# Altium PCB U_I_Meter_WIFI.PcbDoc
Units mm, origin at the board's own origin, x right, y up, seen from the top; angles counter-clockwise.
Board outline 66.83 x 47.73 mm, 2 copper layers (Top Layer, Bottom Layer), stack 1.071 mm thick; 21 components, 10 nets, 106 pads, 8 vias.
Unrouted connection lines stored in the file: 1.
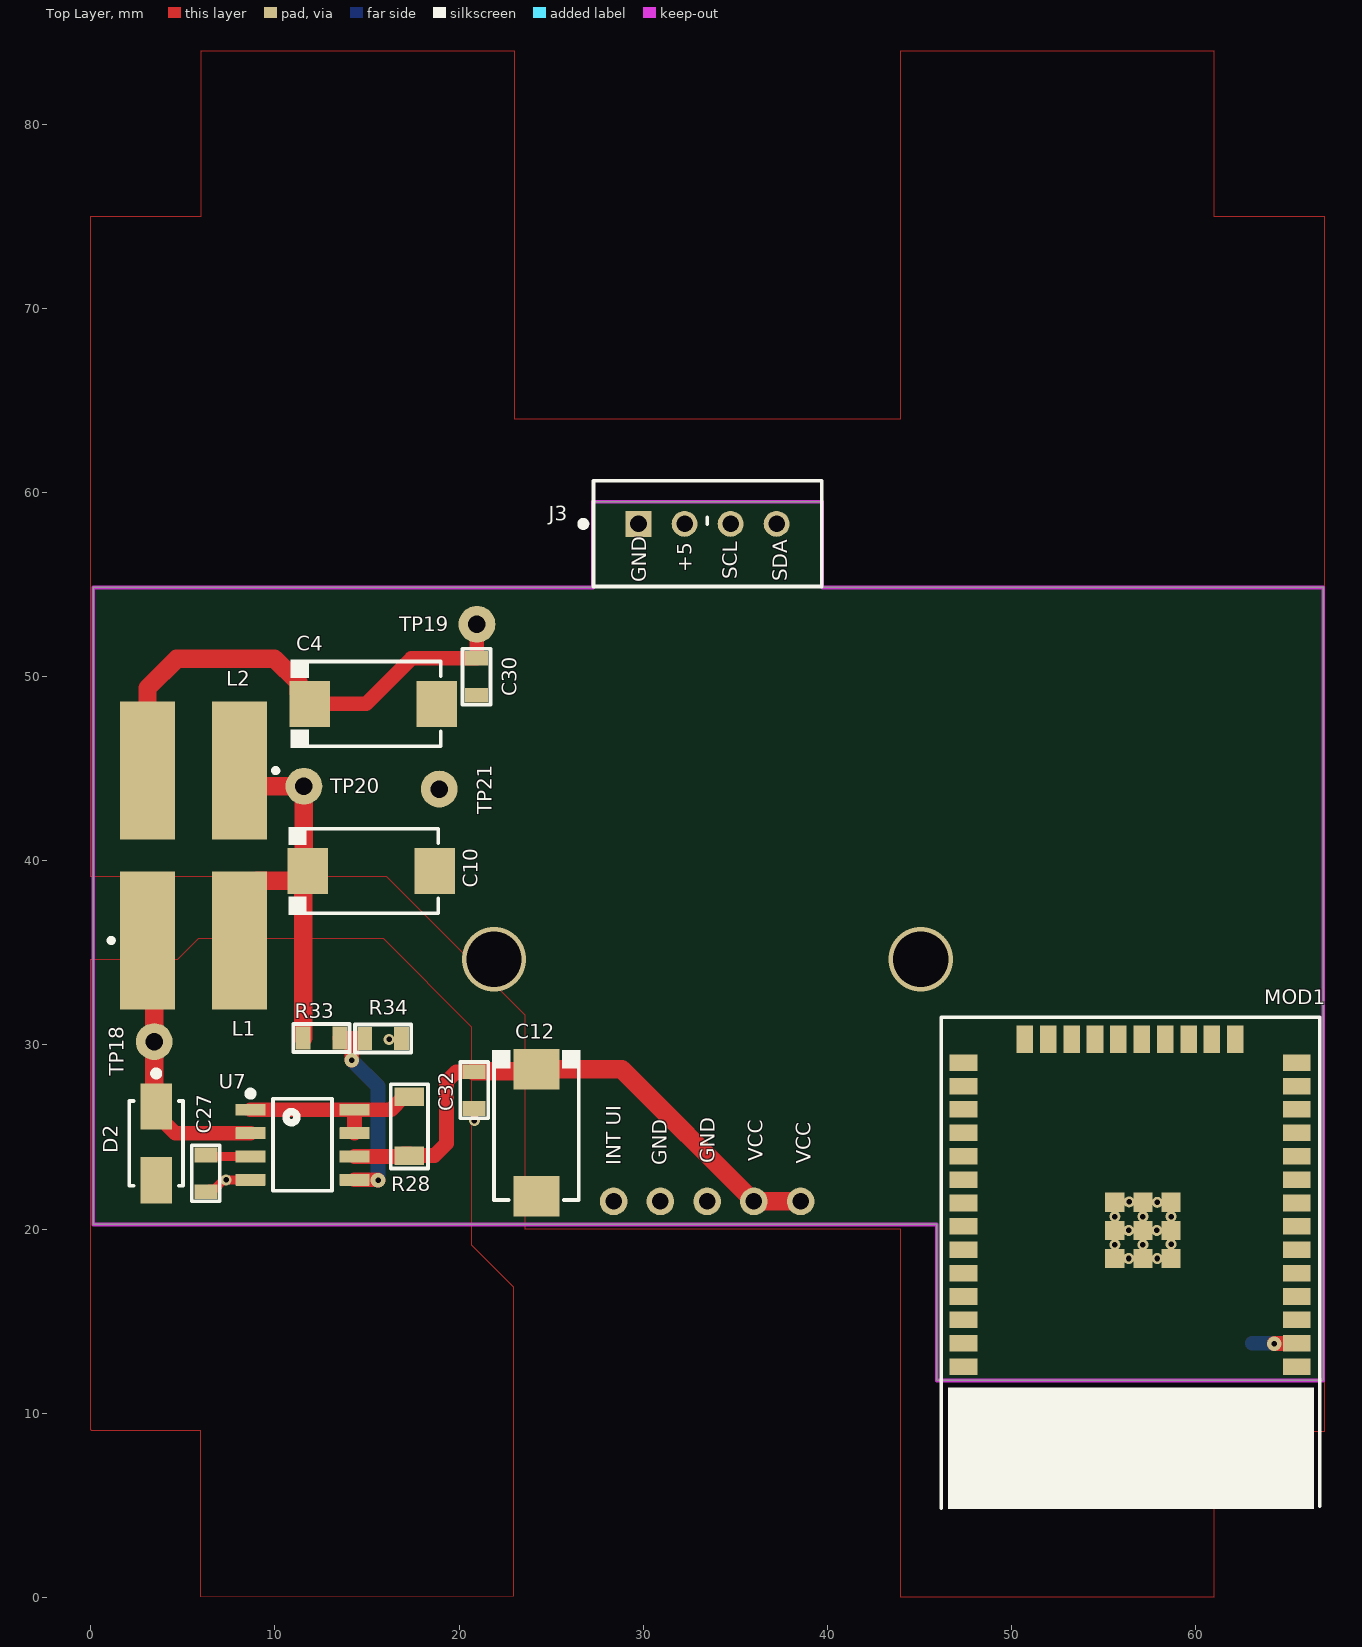
[diagram p0: Top Layer view]
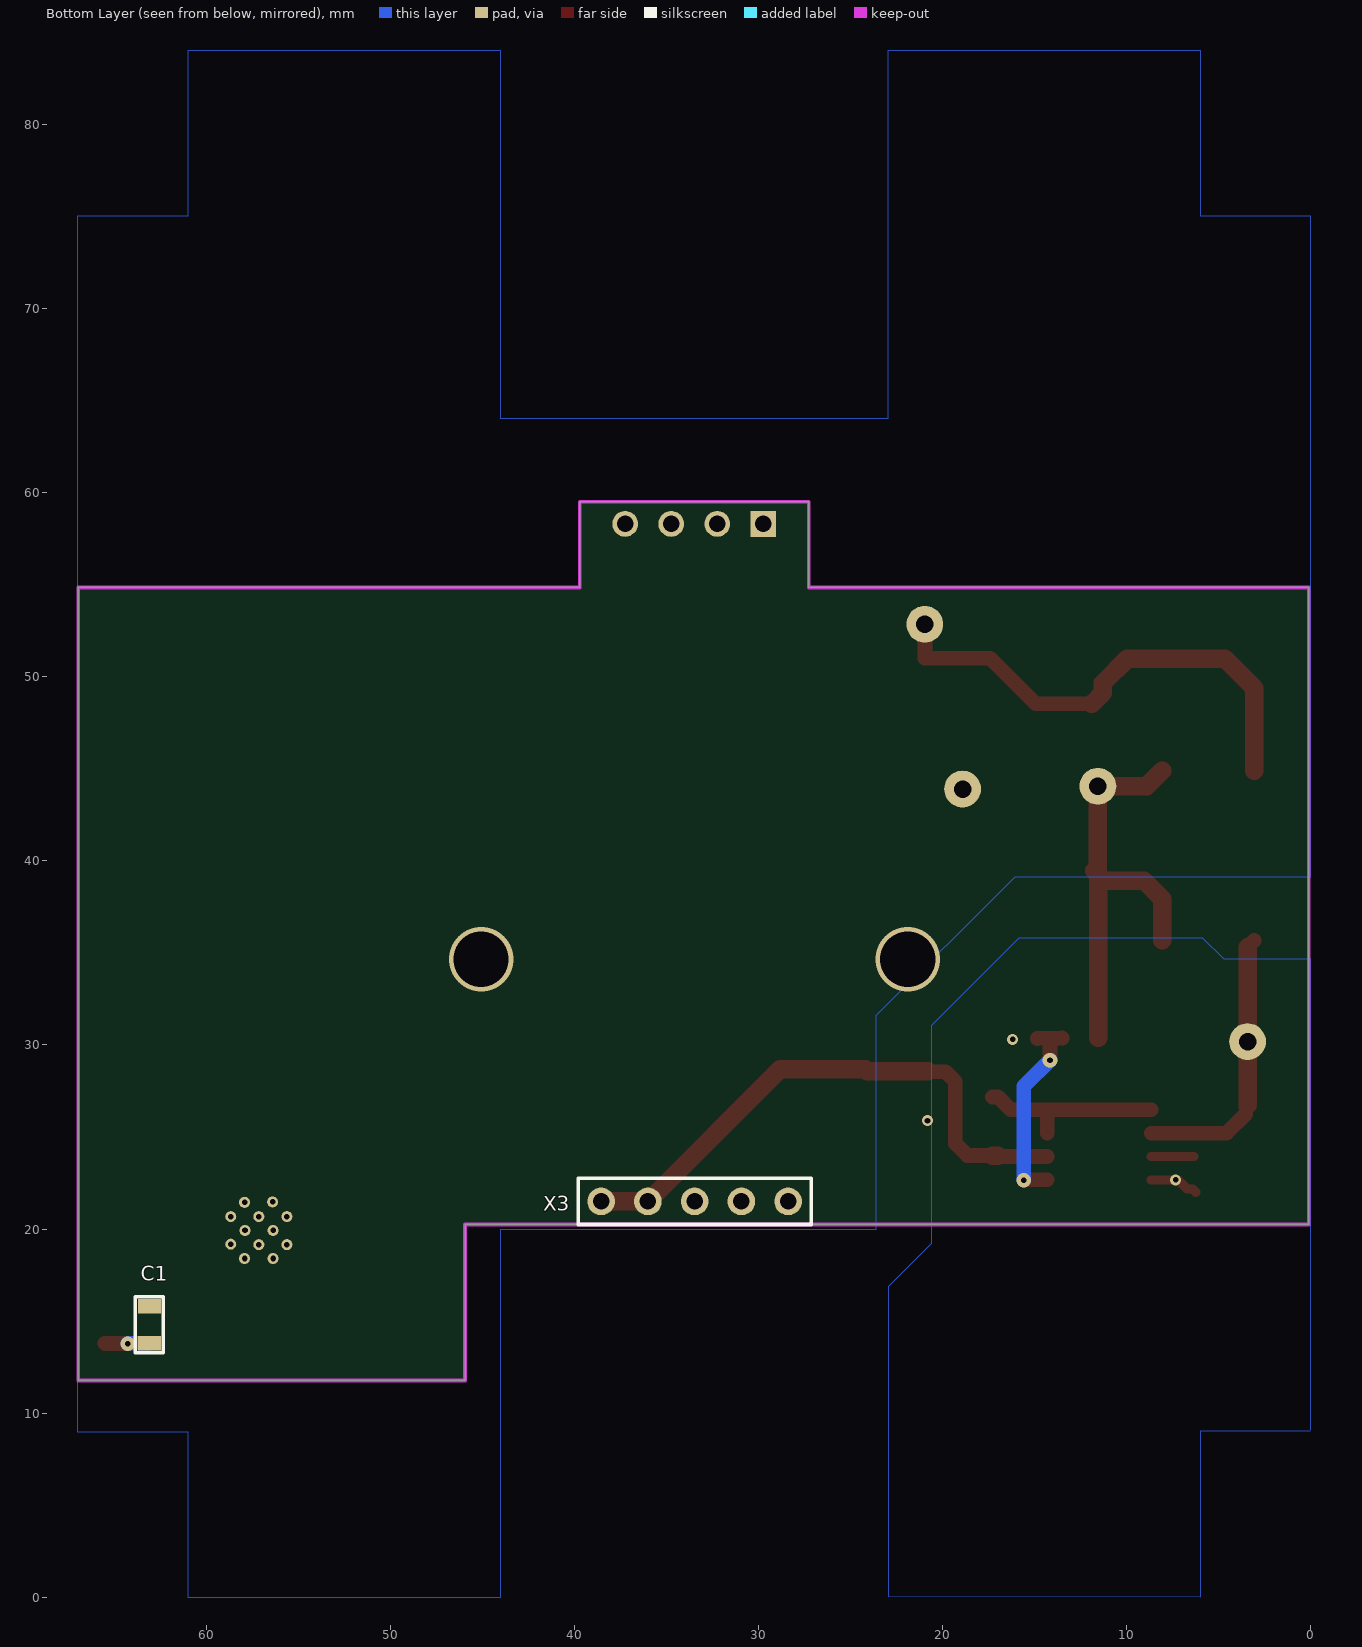
[diagram p1: Bottom Layer view, seen from below]
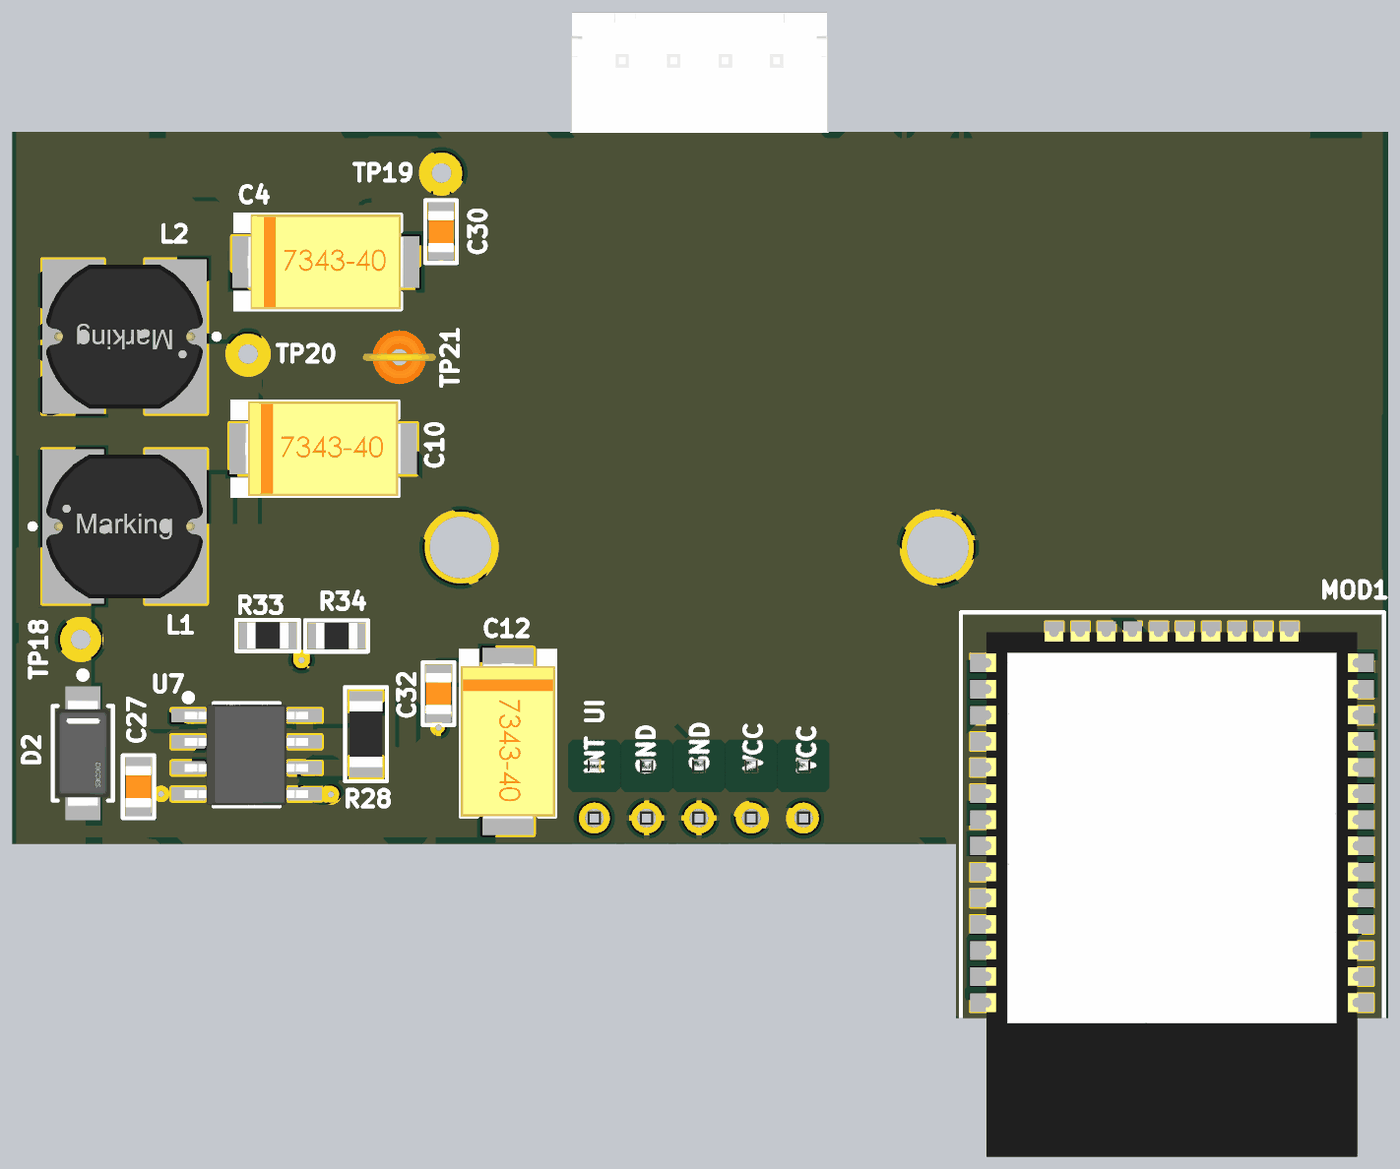
[diagram p2: 3D render of the assembled board from above, using the file's embedded part models]

## Layer stack, top to bottom
Top Solder: solder mask 0.0102, Solder Resist, Dk 3.5
Top Layer: signal copper 0.0356
Dielectric 1: dielectric 1, FR-4, Dk 4.8
Bottom Layer: signal copper 0.0356
Bottom Solder: solder mask 0.0102, Solder Resist, Dk 3.5

## Board outline
0.125,20.25 0.125,54.85 27.275,54.85 27.275,59.5 39.725,59.5 39.725,54.85 66.95,54.85 66.95,11.775 45.95,11.775 45.95,20.25

## Design rules (kind name [scope] priority, off if disabled: settings)
Clearance [All] p1: gap=0.2 ignorepadtopadclearanceinfootprint=FALSE except(0.254: THPad-THPad THPad-Via THPad-Fill THPad-Poly THPad-Region THPad-Text THPad-Hole Via-Via Via-Fill Via-Poly Via-Region Via-Text Via-Hole Fill-Fill Fill-Poly Fill-Region Fill-Text Fill-Hole Poly-Poly Poly-Region Poly-Text Poly-Hole Region-Region Region-Text Region-Hole Text-Text Text-Hole)
ComponentClearance [All] p1: gap=-1 collisioncheckmode=3 verticalgap=0 showdistances=FALSE
Height [All] p1: minheight=-1 maxheight=100 prefheight=12.7
PolygonConnect [All] p1: connectstyle=Relief reliefconductorwidth=0.254 reliefentries=4 polygonreliefangle="90 Angle" airgapwidth=0.254
RoutingVias [All] p1: holewidth=0.711 width=1.27 viastyle="Through Hole" minholewidth=0.711 minwidth=1.27 maxholewidth=0.711 maxwidth=1.27
SolderMaskExpansion [All] p1: expansion=0.102 istentingtop=FALSE
Width [All] p1: maxlimit=10 minlimit=0.254 preferedwidth=0.254 minimp=50.000000 maximp=50.000000 favimp=50.000000
28 further rules are at their usual default settings.

## Components (designator, comment, footprint, x,y, rotation, side; value= is the part's Value field where it differs from the comment)
C1 "0.1uF" CAP-0805 63.1,14.8 r270 bottom
C4 "100uF_16V" CAP-TAN-D 15.35,48.525 r0 top
C10 "100uF_16V" CAP-TAN-D 15.225,39.45 r0 top
C12 "100uF_16V" CAP-TAN-D 24.2,25.225 r270 top
C27 "470pF" CAP-0805 6.25,23.025 r270 top
C30 "0.1uF" CAP-0805 20.95,50 r90 top
C32 "0.47uF" CAP-0805 20.825,27.55 r270 top
D2 "US1G" US1G_SMA 3.55,24.65 r270 top
J3 "B4B-XH-A(LF)(SN)" B4B-XH-A 33.5,57.775 r180 top
L1 "47µH, 1.17A" WE-PD2_7850 5.575,35.675 r0 top
L2 "47µH, 1.17A" WE-PD2_7850 5.575,44.9 r180 top
MOD1 "MOD-ESP32-WROOM-32E" MOD-ESP32-WROOM-32E 56.45,21.415 r180 top locked
R28 "0.33" RES-1206 17.3,25.575 r90 top
R33 "3.8K" RES-0805 12.525,30.375 r0 top
R34 "1.2K" RES-0805 15.875,30.35 r180 top
TP18 "Test_Point_PCB" Test_Point 3.444,30.181 r90 top
TP19 "Test_Point_PCB" Test_Point 20.975,52.85 r90 top
TP20 "Test_Point_PCB" Test_Point 11.575,44.05 r270 top
TP21 "Test_Point_PCB" Pin_Test_Point(Orange) 18.925,43.9 r90 top
U7 "MC34063" SOIC-8_M 11.5,24.575 r0 top
X3 "CONN-5-PIN" CONN-PLS-5-2.54_2 28.395,21.5 r0 bottom locked

## Footprints (in the part's own frame and the unit in brackets; to place one, negate y for a bottom-side part, rotate by r counter-clockwise, add the part's x,y. Pads: shape width x height; smd on the part's side, far side on the other; paste and mask are expansions set on the pad)
B4B-XH-A [mm]
  rect 1.4x1.4 hole 0.9 paste-2539.97 mask+0: 1(3.75,-0.525)
  round 1.4 hole 0.9 paste-2539.97 mask+0: 2(1.25,-0.525) 3(-1.25,-0.525) 4(-3.75,-0.525)
  silkscreen extent -6.2,-2.88 6.87,2.88, body extent -6.3,-2.98 6.3,2.98, height 0.25
CAP-0805 [mm]
  rect 0.8x1.25 smd mask+0.015: 1(-1,0) 2(1,0)
  silkscreen extent -1.52,-0.76 1.52,0.76, body extent -1,-0.62 1,0.63, height 0.8
CAP-TAN-D [mm]
  rect 2.2x2.5 smd: 1(-3.45,0) 2(3.45,0)
  silkscreen extent -4.5,-2.4 3.65,2.4, body extent -3.8,-2.3 3.8,2.3, height 4
CONN-PLS-5-2.54_2 [mm]
  round 1.5 hole 0.9: 1(0,0) 2(2.54,0) 3(5.08,0) 4(7.62,0) 5(10.16,0)
  silkscreen extent -1.25,-1.25 11.41,1.25, body extent -1.27,-3.81 11.43,1.27, height 19.54
MOD-ESP32-WROOM-32E [mm]
  rect 1.5x0.9 smd paste+0 mask+0.05: 1(-9.05,8.89) 2(-9.05,7.62) 3(-9.05,6.35) 4(-9.05,5.08) 5(-9.05,3.81) 6(-9.05,2.54) 7(-9.05,1.27) 8(-9.05,0) 9(-9.05,-1.27) 10(-9.05,-2.54) 11(-9.05,-3.81) 12(-9.05,-5.08) 13(-9.05,-6.35) 14(-9.05,-7.62) 25(9.05,-7.62) 26(9.05,-6.35) 27(9.05,-5.08) 28(9.05,-3.81) 29(9.05,-2.54) 30(9.05,-1.27) 31(9.05,0) 32(9.05,1.27) 33(9.05,2.54) 34(9.05,3.81) 35(9.05,5.08) 36(9.05,6.35) 37(9.05,7.62) 38(9.05,8.89)
  rect 0.9x1.5 smd paste+0 mask+0.05: 15(-5.715,-8.89) 16(-4.445,-8.89) 17(-3.175,-8.89) 18(-1.905,-8.89) 19(-0.635,-8.89) 20(0.635,-8.89) 21(1.905,-8.89) 22(3.175,-8.89) 23(4.445,-8.89) 24(5.715,-8.89)
  rect 1.05x1.05 smd paste+0 mask+0.05: 39(-2.225,1.49) 39(-2.225,3.015) 39(-2.225,-0.035) 39(-0.7,3.015) 39(-0.7,1.49) 39(-0.7,-0.035) 39(0.825,3.015) 39(0.825,1.49) 39(0.825,-0.035)
  round 0.6 hole 0.3: 39(-2.225,2.24) 39(-2.225,0.74) 39(-1.475,3.015) 39(-1.475,-0.035) 39(-1.45,1.49) 39(-0.7,2.265) 39(-0.7,0.74) 39(0.05,-0.06) 39(0.075,3.015) 39(0.075,1.49) 39(0.825,2.265) 39(0.825,0.74)
  silkscreen extent -10.3,-10.08 10.25,16.62, body extent -9.04,-9.16 9.04,16.38, height 3
Pin_Test_Point(Orange) [mm]
  round 2 hole 0.95: 1(0,0)
  body extent -1.3,-1.78 1.3,1.78, height 6.93
RES-0805 [mm]
  rect 0.8x1.25 smd mask+0.015: 1(-1,0) 2(1,0)
  silkscreen extent -1.52,-0.76 1.52,0.76, body extent -1,-0.62 1,0.63, height 0.6
RES-1206 [mm]
  rect 1x1.6 smd: 1(-1.6,0) 2(1.6,0)
  silkscreen extent -2.29,-1.02 2.29,1.02, body extent -1.6,-0.8 1.6,0.8, height 0.6
SOIC-8_M [mm]
  rrect15% 1.65x0.65 smd: 1(-2.825,1.905) 2(-2.825,0.635) 3(-2.825,-0.635) 4(-2.825,-1.905) 5(2.825,-1.905) 6(2.825,-0.635) 7(2.825,0.635) 8(2.825,1.905)
  silkscreen extent -2.95,-2.5 1.6,2.9, body extent -3,-2.45 3,2.45, height 1.63
Test_Point [mm]
  round 2 hole 0.95: 1(0,0)
US1G_SMA [mm]
  rect 2.5x1.7 smd paste+0 mask+0: 1(-2,0) 2(2,0)
  silkscreen extent -3.92,-1.46 2.3,1.46, body extent -2.6,-1.3 2.6,1.3, height 2.4
WE-PD2_7850 [mm] "SMD Power Inductor, 2-Leads, body 7.8x7mm"
  rect 3x7.5 smd: 1(-2.5,0) 2(2.5,0)
  silkscreen extent -4.59,-0.12 -4.34,0.12, body extent -3.81,-3.5 3.81,3.5, height 4.95

## Part data
C1 C27 C30 C32: library part CAP-NON-POLAR
C4 C10 C12: library part CAP_POL_SMD
L1 L2: library part 744775147, "WE-PD2 SMT Power Inductor, size 7850, 47µH, 1.17A, 0.18Ω", Case/Size Code=7850, DC Resistance=0.134Ω, DC Resistance Max=0.18Ω, Inductance=47µH, Manufacturer="Wurth Elektronik", Operating Temperature Max=125°C, Operating Temperature Min=-40°C, Rated Current=1.17A, Saturation Current=1.24A, Self Resonant Frequency=12MHz, Category="Unshielded Power Inductors", ComponentLink1Description="Website Link", ComponentLink1URL=https://www.we-online.com/redexpert/article/744775147?ad, ComponentLink2Description="Datasheet Link", ComponentLink2URL=https://www.we-online.com/redexpert/spec/744775147?ad, Height=4.95mm, Length=7.8mm, Manufacturer Part Number=744775147, Match Code=WE-PD2, Mount="Surface Mount", Packaging="Tape and Reel", Width=7mm
R28 R34: library part RES-CONST
R33: library part RES-CONST, "10K"
TP18 TP19 TP20 TP21: library part TP_PCB?, "Test_Point"

## Via types
v1: diameter 0.6, hole 0.3, Top Layer to Bottom Layer, 3 vias
v2: diameter 0.8, hole 0.3, Top Layer to Bottom Layer, 3 vias
v3: diameter 3.5, hole 3, Top Layer to Bottom Layer, 2 vias

## Nets (pads, with @x,y where several pads share a name; then routed paths per layer and width w, separated by ;. In a path a pad name is that pad's centre, name@x,y a point inside that pad or via, vN(x,y) a via of type N, cw(c..) or ccw(c..) an arc to the next point about the centre after c; other vN are vias at no path point)
3V3: C1.2 C4.1 C30.2 L2.2 MOD1.2 TP19.1 | length 29.6
  Top Layer w0.8: C4.1 14.95,48.525 17.425,51 C30.2 20.962,51 20.962,52.837 TP19.1 ; v2(64.275,13.775) 64.285,13.785 65.49,13.785 MOD1.2
  Top Layer w1: L2.2 3.081,44.906 3.081,49.381 4.675,50.975 9.975,50.975 11.3,49.65 11.3,49.125 C4.1
  Bottom Layer w0.8: C1.2 64.25,13.8 v2(64.275,13.775)
EN: 
GND_III: C1.1 C4.2 C10.2 C12.2 C27.2 C30.1 C32.2 D2.2 J3.1 MOD1.1 MOD1.15 MOD1.38 MOD1.39 R34.1 TP21.1 U7.4 X3.2 X3.3 | length 2.7
  Top Layer w0.5: C27.2@6.261,22 6.436,22.175 6.725,22.175 7.22,22.67 U7.4
  other v1: 7.35,22.675 20.828,25.891 16.2,30.3
NetC10_1: C10.1 L1.2 L2.1 R33.1 TP20.1 | length 23.8
  Top Layer w1: L1.2 8.075,37.925 9.075,38.925 11.5,38.925 C10.1@11.55,38.975 ; L2.1 8.925,44.05 TP20.1 C10.1@11.575,39.45 ; R33.1@11.55,30.375 C10.1@11.55,38.975 ; C10.1 11.55,39.225 C10.1@11.55,38.975
NetC27_1: C27.1 U7.3 | length 2.3
  Top Layer w0.5: C27.1@6.372,23.94 U7.3
NetD2_1: D2.1 L1.1 TP18.1 U7.2 | length 14.8
  Top Layer w0.8: L1.1 L1.1@3.444,35.306 ; D2.1@3.444,26.756 D2.1 ; D2.1@3.55,26.25 4.59,25.21 U7.2
  Top Layer w1: D2.1@3.444,26.756 TP18.1 L1.1@3.444,35.306
NetR28_2: R28.2 U7.1 U7.7 U7.8 | length 10.2
  Top Layer w0.8: U7.1 U7.8 ; U7.7 U7.8 ; R28.2 17,27.175 16.305,26.48 U7.8
NetR33_2: R33.2 R34.2 U7.5 | length 10.9
  Top Layer w0.8: R33.2 13.525,30.362 14.175,30.362 14.875,30.362 R34.2 ; v2(14.175,29.175) 14.175,30.337 ; U7.5 15.58,22.67 v2(15.6,22.65)
  Bottom Layer w0.8: v2(14.175,29.175) 15.6,27.75 v2(15.6,22.65)
NetX3_1: X3.1
VCC: C12.1 C32.1 R28.1 U7.6 X3.4 X3.5 | length 31.1
  Top Layer w0.8: U7.6 R28.1@16.965,23.94 ; R28.1 17.324,23.999 18.674,23.999 19.325,24.65 19.325,28.025 19.85,28.55 C32.1
  Top Layer w1: R28.1@17,23.975 R28.1 ; C32.1@20.825,28.575 24.1,28.575 C12.1 28.84,28.675 X3.4 X3.5
pads on no net: J3.2 J3.3 J3.4 MOD1.3 MOD1.4 MOD1.5 MOD1.6 MOD1.7 MOD1.8 MOD1.9 MOD1.10 MOD1.11 MOD1.12 MOD1.13 MOD1.14 MOD1.16 MOD1.17 MOD1.18 MOD1.19 MOD1.20 MOD1.21 MOD1.22 MOD1.23 MOD1.24 MOD1.25 MOD1.26 MOD1.27 MOD1.28 MOD1.29 MOD1.30 MOD1.31 MOD1.32 MOD1.33 MOD1.34 MOD1.35 MOD1.36 MOD1.37
copper on no net:
  other v3: 21.9,34.65 45.075,34.65

## Polygon pours and split planes (outlines as drawn)
GND_III on Top Layer "NONET_L-01_P-001" (solid, shelved, pour order 4): 0.125,54.85 27.275,54.85 27.25,54.875 27.25,59.475 27.275,59.5 39.725,59.5 39.725,54.85 66.95,54.85 66.95,11.775 45.95,11.775 45.95,20.25 0.125,20.25
GND_III on Top Layer "NONET_L-01_P-001" (solid, shelved, pour order 3): 44,0 44,20 23.6,20 23.6,31.6 16.075,39.125 0,39.125 0,75 6,75 6,84 23,84 23,64 44,64 44,84 61,84 61,75 67,75 67,9 61,9 61,0
no net on Top Layer "NONET_L-01_P-001" (solid, shelved, pour order 1): 5.975,0.025 5.975,9.05 0.05,9.05 0,9.1 0,34.65 4.72,34.65 5.87,35.8 15.875,35.8 20.675,31 20.675,19.15 22.95,16.875 22.95,0.05
no net on Bottom Layer "NONET_L-01_P-001" (solid, shelved, pour order 5): 0.125,54.85 27.275,54.85 27.25,54.875 27.25,59.475 27.275,59.5 39.725,59.5 39.725,54.85 66.95,54.85 66.95,11.775 45.95,11.775 45.95,20.25 0.125,20.25
GND_III on Bottom Layer "NONET_L-01_P-001" (solid, shelved, pour order 2): 44,0 44,20 23.6,20 23.6,31.6 16.075,39.125 0,39.125 0,75 6,75 6,84 23,84 23,64 44,64 44,84 61,84 61,75 67,75 67,9 61,9 61,0
no net on Bottom Layer "NONET_L-01_P-001" (solid, shelved, pour order 0): 5.975,0.025 5.975,9.05 0.05,9.05 0,9.1 0,34.65 4.72,34.65 5.87,35.8 15.875,35.8 20.625,31.05 20.625,19.2 22.95,16.875 22.95,0.05

## Keep-outs
Keep-Out Layer:
  lines w0.2: 0.125,20.25 0.125,54.85 27.275,54.85 27.275,59.5 39.725,59.5 39.725,54.85 66.95,54.85 66.95,37.637 66.95,28.763 66.95,20.262 66.95,11.775 45.95,11.775 45.95,20.25 0.125,20.25

## Silkscreen, mask and mechanical layers (free items; w line width, h text height)
Top Overlay:
  lines w0.2: 33.475,58.275 33.475,58.65
  text "+5" at 32.646,55.679 h0.8 r90
  text "SCL" at 35.121,55.304 h0.8 r90
  text "SDA" at 37.821,55.179 h0.8 r90
  text "GND" at 30.171,55.129 h0.8 r90
  text "VCC" at 36.496,23.679 h0.8 r90
  text "GND" at 33.896,23.579 h0.8 r90
  text "VCC" at 39.096,23.554 h0.8 r90
  text "INT UI" at 28.796,23.454 h0.8 r90
  text "GND" at 31.296,23.454 h0.8 r90